# EAGLE board TuesdayR3_JIG (EAGLE 7.7.0)
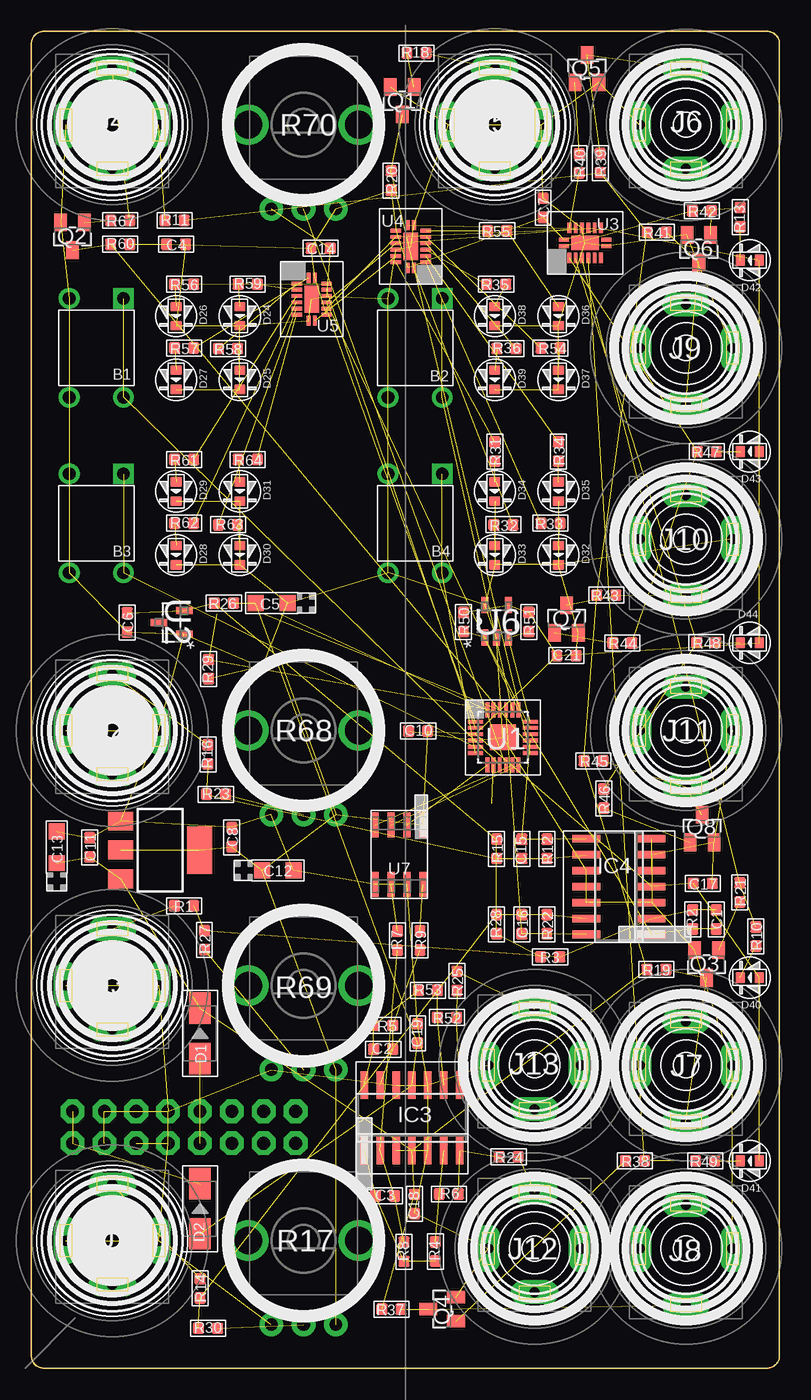
[diagram p0: board, top side]
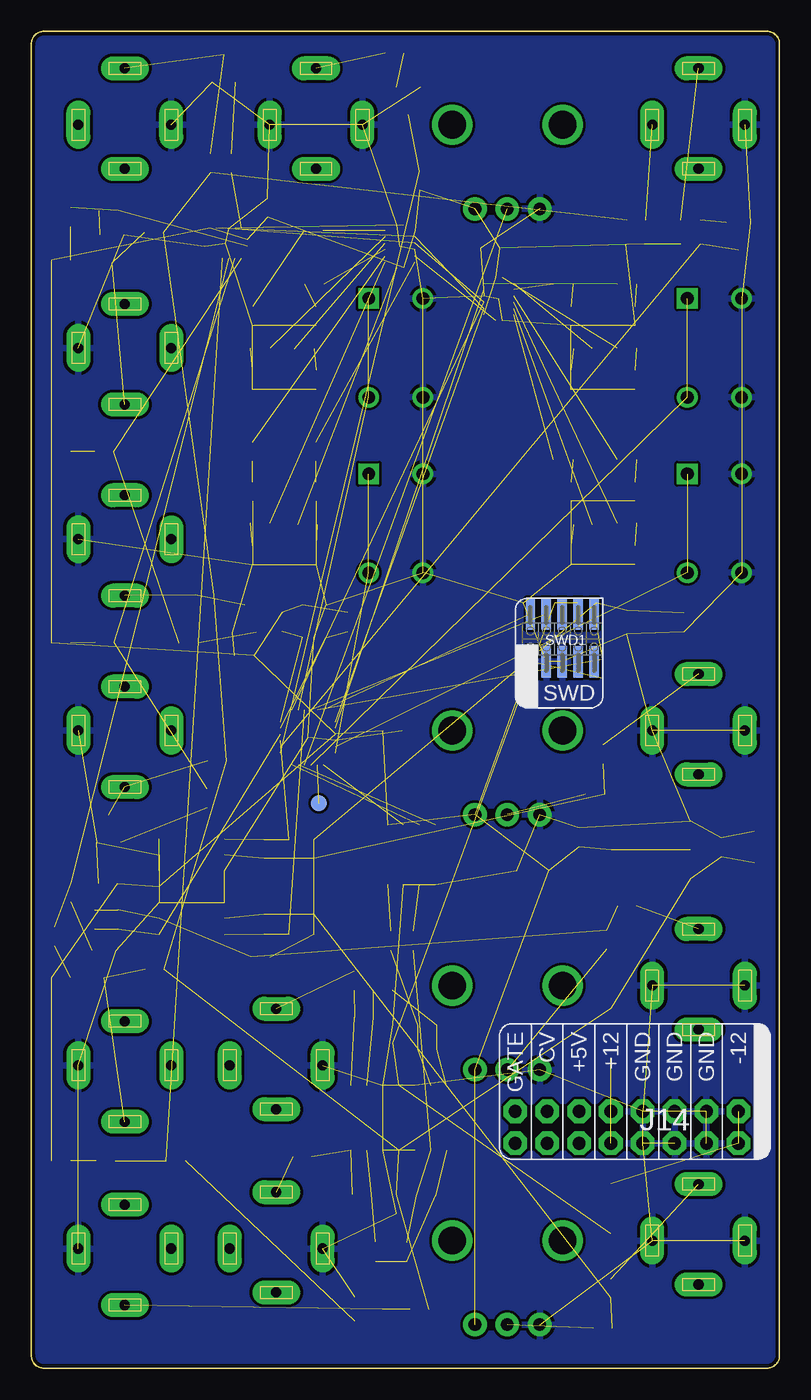
[diagram p1: board, bottom side, seen from below]

Size 59.62 x 106.5 mm. Coordinates in mm from the lower left corner, seen from the top.
Copper layers (1*16): Top 0.035mm / dielectric 1.5mm / Bottom 0.035mm
Design rules "dirt_cheap_dirty_boards.v1": minimum track width 5mil, minimum drill 12mil, track to track 5mil, track to pad 5mil, pad to pad 5mil, via to via 5mil, smd to smd 0mil, copper to edge 10mil, drill to drill 10mil, minimum pad ring 10mil, minimum via ring 6mil, stop-mask expansion 2mil, vias tented up to drill 25mil, thermal gap 10mil
Net classes: 0 default: width 0.203 mm, clearance 0.178 mm; 1 heavypower: width 0.381 mm; 2 mediumpower: width 0.254 mm; 3 groundplane: width 0.254 mm, clearance 0.203 mm

## Footprints (pad centres in the part's own frame; a part is rotated, then mirrored left to right if it is on the bottom)
4P-6.0X6.0X5.0H = drill 1.016 pad 1.651 square: 1 -3.937,2.159 | drill 1.016 pad 1.651: 2 -3.937,-2.159; 3 3.937,-2.159; 4 3.937,2.159
C0603 = smd 0.889 x 0.889: 1 -0.762,0; 2 0.762,0
AVX-A = smd 1.27 x 1.27: + -1.27,0; - 1.27,0
DO-214AC = smd 2.5 x 1.7: 1 -2,0; 2 2,0
LED0603 = smd 0.762 x 0.889: + -0.762,0; - 0.762,0
SOT223 = smd 1.5 x 2: 1 -2.3,-3.15; 2 0,-3.15; 3 2.3,-3.15 | smd 3.8 x 2: 4 0,3.15
SO14 = smd 0.6 x 2.2: 1 -3.81,-2.6; 2 -2.54,-2.6; 3 -1.27,-2.6; 4 0,-2.6; 5 1.27,-2.6; 6 2.54,-2.6; 7 3.81,-2.6; 8 3.81,2.6; 9 2.54,2.6; 10 1.27,2.6; 11 0,2.6; 12 -1.27,2.6; 13 -2.54,2.6; 14 -3.81,2.6
3.5MM-JACK-SWITCH-13MM-INPUT = drill 0.8 pad 1.93 long: RING@3 -3.7,0; SECOND@3 0,-3.5; SWITCH@3 3.7,0; TIP@3 0,4.5
3.5MM-JACK-SWITCH-13MM-OUTPUT = drill 0.8 pad 1.93 long: RING@3 -3.7,0; SECOND@3 0,-3.5; SWITCH@3 3.7,0; TIP@3 0,4.5
POWER_16 = drill 1.016 pad 1.88 octagon: 1 -6.35,-1.27; 2 -6.35,1.27; 3 -3.81,-1.27; 4 -3.81,1.27; 5 -1.27,-1.27; 6 -1.27,1.27; 7 1.27,-1.27; 8 1.27,1.27; 9 3.81,-1.27; 10 3.81,1.27; 11 6.35,-1.27; 12 6.35,1.27; 13 8.89,-1.27; 14 8.89,1.27; 15 11.43,-1.27; 16 11.43,1.27
SOT23-BEC = smd 1 x 1.4: B -0.95,-1.1; C 0,1.1; E 0.95,-1.1
R0603 = smd 0.889 x 0.889: 1 -0.762,0; 2 0.762,0
OG-POTS_ALPS_POT_VERTICAL = drill 1 pad 1.88: P$1 -2.58,-6.7; P$2 0,-6.7; P$3 2.58,-6.7 | drill 2.2 pad 3.175: P$4 4.4,0; P$5 -4.4,0
M50-3600542 = smd 0.75 x 2.5: 1 -2.54,-1.81; 2 -2.54,2; 3 -1.27,-1.81; 4 -1.27,2; 5 0,-1.81; 6 0,2; 7 1.27,-1.81; 8 1.27,2; 9 2.54,-1.81; 10 2.54,2
B1,27 = smd 1.27 x 1.27: TP 0,0
QFN50P400X400X100-25N = smd 1.2 x 0.3: 1 -2.2,1.245; 2 -2.2,0.762; 3 -2.2,0.254; 4 -2.2,-0.254; 5 -2.2,-0.762; 6 -2.2,-1.245; 13 2.2,-1.245; 14 2.2,-0.762; 15 2.2,-0.254; 16 2.2,0.254; 17 2.2,0.762; 18 2.2,1.245 | smd 0.3 x 1.2: 7 -1.245,-2.2; 8 -0.762,-2.2; 9 -0.254,-2.2; 10 0.254,-2.2; 11 0.762,-2.2; 12 1.245,-2.2; 19 1.245,2.2; 20 0.762,2.2; 21 0.254,2.2; 22 -0.254,2.2 | smd 0.305 x 1.2: 23 -0.762,2.2; 24 -1.245,2.2 | smd 2.032 x 2.032: 25 0,0
SOT95P237X112-3N = smd 1.321 x 0.559: 1 -1.016,0.94; 2 -1.016,-0.94; 3 1.016,0
QFN50P250X350X100-17N = smd 0.305 x 0.813: 1 -0.254,1.702; 8 -0.254,-1.702; 9 0.254,-1.702; 16 0.254,1.702 | smd 0.813 x 0.305: 2 -1.194,1.245; 3 -1.194,0.762; 4 -1.194,0.254; 5 -1.194,-0.254; 6 -1.194,-0.762; 7 -1.194,-1.245; 10 1.194,-1.245; 11 1.194,-0.762; 12 1.194,-0.254; 13 1.194,0.254; 14 1.194,0.762; 15 1.194,1.245 | smd 1.143 x 2.159: 17 0,0
SOT95P290X145-5N = smd 1.27 x 0.559: 1 -1.295,0.94; 2 -1.295,0; 3 -1.295,-0.94; 4 1.295,-0.94; 5 1.295,0.94
SOIC8-N_MC = smd 1.981 x 0.559: 1 -2.362,1.905; 2 -2.362,0.635; 3 -2.362,-0.635; 4 -2.362,-1.905; 5 2.362,-1.905; 6 2.362,-0.635; 7 2.362,0.635; 8 2.362,1.905

## Placement (x,y rotation side)
B1  BUTTON-4P-3110040P1  [4P-6.0X6.0X5.0H]  5.18,81.28 270 top
B2  BUTTON-4P-3110040P1  [4P-6.0X6.0X5.0H]  30.58,81.28 270 top
B3  BUTTON-4P-3110040P1  [4P-6.0X6.0X5.0H]  5.18,67.31 270 top
B4  BUTTON-4P-3110040P1  [4P-6.0X6.0X5.0H]  30.58,67.31 270 top
C1  3.3nF  [C0603]  54.58,35.75 270 top
C2  3.3nF  [C0603]  28.04,25.4 180 top
C3  3.3nF  [C0603]  28.17,13.72 180 top
C4  100nF  [C0603]  11.53,89.53 180 top
C5  10uF  [AVX-A]  19.15,60.96 180 top
C6  100nF  [C0603]  7.63,59.41 90 top
C7  100nF  [C0603]  40.78,92.45 270 top
C8  100nF  [C0603]  15.97,42.3 270 top
C10  100nF  [C0603]  30.83,50.75 0 top
C11  100nF  [C0603]  4.65,41.49 270 top
C12  10uF  [AVX-A]  19.64,39.66 0 top
C13  10uF  [AVX-A]  2.02,41.5 90 top
C14  100nF  [C0603]  23.05,89.23 180 top
C15  3.3nF  [C0603]  39.08,41.37 90 top
C16  3.3nF  [C0603]  39.08,35.37 270 top
C17  100nF  [C0603]  53.51,38.62 0 top
C18  100nF  [C0603]  30.54,13.08 90 top
C19  100nF  [C0603]  30.79,26.66 270 top
C21  100nF  [C0603]  42.64,56.77 180 top
D1  MRA4004T3G  [DO-214AC]  13.44,26.67 90 top
D2  MRA4004T3G  [DO-214AC]  13.44,12.7 90 top
D24  yellow  [LED0603]  16.61,83.82 270 top
D25  yellow  [LED0603]  16.61,78.74 270 top
D26  yellow  [LED0603]  11.53,83.82 270 top
D27  yellow  [LED0603]  11.53,78.74 270 top
D28  yellow  [LED0603]  11.53,64.77 270 top
D29  yellow  [LED0603]  11.53,69.85 270 top
D30  yellow  [LED0603]  16.61,64.77 270 top
D31  yellow  [LED0603]  16.61,69.85 270 top
D32  yellow  [LED0603]  42.01,64.77 270 top
D33  yellow  [LED0603]  36.93,64.77 270 top
D34  yellow  [LED0603]  36.93,69.85 270 top
D35  yellow  [LED0603]  42.01,69.85 270 top
D36  yellow  [LED0603]  42.01,83.82 270 top
D37  yellow  [LED0603]  42.01,78.74 270 top
D38  yellow  [LED0603]  36.93,83.82 270 top
D39  yellow  [LED0603]  36.93,78.74 270 top
D40  yellow  [LED0603]  57.25,31.11 180 top
D41  yellow  [LED0603]  57.25,16.51 180 top
D42  yellow  [LED0603]  57.25,88.27 180 top
D43  yellow  [LED0603]  57.25,73.03 180 top
D44  yellow  [LED0603]  57.25,57.78 180 top
IC1  LD1117S33CTR  [SOT223]  10.26,41.27 270 top
IC3  TL074D  [SO14]  30.33,19.93 0 top
IC4  MCP6004  [SO14]  46.83,38.37 90 top
J1  PJ-341  [3.5MM-JACK-SWITCH-13MM-INPUT]  6.45,10.16 0 top
J2  PJ-341  [3.5MM-JACK-SWITCH-13MM-INPUT]  6.45,50.8 0 top
J3  PJ-341  [3.5MM-JACK-SWITCH-13MM-INPUT]  6.45,30.48 0 top
J4  PJ-341  [3.5MM-JACK-SWITCH-13MM-INPUT]  6.45,99.06 0 top
J5  PJ-341  [3.5MM-JACK-SWITCH-13MM-INPUT]  36.93,99.06 0 top
J6  PJ-341  [3.5MM-JACK-SWITCH-13MM-OUTPUT]  52.17,99.06 0 top
J7  PJ-341  [3.5MM-JACK-SWITCH-13MM-OUTPUT]  52.17,24.13 180 top
J8  PJ-341  [3.5MM-JACK-SWITCH-13MM-OUTPUT]  52.17,9.53 180 top
J9  PJ-341  [3.5MM-JACK-SWITCH-13MM-OUTPUT]  52.17,81.28 180 top
J10  PJ-341  [3.5MM-JACK-SWITCH-13MM-OUTPUT]  52.17,66.04 180 top
J11  PJ-341  [3.5MM-JACK-SWITCH-13MM-OUTPUT]  52.17,50.8 180 top
J12  PJ-341  [3.5MM-JACK-SWITCH-13MM-OUTPUT]  40.1,9.53 0 top
J13  PJ-341  [3.5MM-JACK-SWITCH-13MM-OUTPUT]  40.1,24.13 0 top
J14  POWER  [POWER_16]  9.62,19.18 180 bottom
OUTLINE  EURORACK_PCB12HP  [EURORACK12HPPCB]  -0.5,0 0 top
Q1  MMBT3904  [SOT23-BEC]  29.56,100.97 180 top
Q2  MMBT3904  [SOT23-BEC]  3.28,90.17 180 top
Q3  MMBT3904  [SOT23-BEC]  53.82,32.19 180 top
Q4  MMBT3904  [SOT23-BEC]  32.74,4.7 90 top
Q5  MMBT3904  [SOT23-BEC]  44.27,103.53 0 top
Q6  MMBT3904  [SOT23-BEC]  53.19,89.19 180 top
Q7  MMBT3904  [SOT23-BEC]  42.64,59.69 0 top
Q8  MMBT3904  [SOT23-BEC]  53.45,42.98 0 top
R1  100k  [R0603]  12.17,36.83 180 top
R2  33k  [R0603]  52.7,35.75 90 top
R3  51k  [R0603]  41.34,32.77 180 top
R4  100k  [R0603]  32.19,9.29 90 top
R5  30k  [R0603]  28.04,27.3 0 top
R6  100k  [R0603]  33.27,13.87 0 top
R7  12k  [R0603]  29.17,34.06 90 top
R8  30k  [R0603]  29.7,9.28 90 top
R9  12k  [R0603]  30.96,34.06 90 top
R10  56  [R0603]  57.74,34.38 90 top
R11  10k  [R0603]  11.42,91.44 0 top
R12  33k  [R0603]  41.08,41.37 270 top
R13  56  [R0603]  56.49,91.69 90 top
R14  100k  [R0603]  13.44,6.35 90 top
R15  51k  [R0603]  37.08,41.37 90 top
R16  100k  [R0603]  14.07,48.9 90 top
R17  10kB  [OG-POTS_ALPS_POT_VERTICAL]  21.69,10.16 0 top
R18  100k  [R0603]  30.7,104.78 180 top
R19  10k  [R0603]  49.81,31.76 180 top
R20  10k  [R0603]  28.67,94.61 270 top
R21  100k  [R0603]  56.45,37.89 270 top
R22  33k  [R0603]  41.08,35.37 90 top
R23  33k  [R0603]  14.71,45.72 0 top
R24  100  [R0603]  38.03,16.83 180 top
R25  100  [R0603]  33.91,30.85 270 top
R26  10k  [R0603]  15.34,60.96 180 top
R27  33k  [R0603]  13.79,34.1 270 top
R28  51k  [R0603]  37.08,35.37 270 top
R29  10k  [R0603]  14.12,55.69 90 top
R30  33k  [R0603]  14.07,3.17 0 top
R31  56  [R0603]  36.93,73.03 90 top
R32  56  [R0603]  37.61,67.19 0 top
R33  56  [R0603]  41.38,67.31 180 top
R34  56  [R0603]  42.01,73.03 90 top
R35  56  [R0603]  37.05,86.36 180 top
R36  56  [R0603]  37.86,81.22 0 top
R37  10k  [R0603]  28.7,4.7 180 top
R38  100k  [R0603]  48.11,16.51 180 top
R39  10k  [R0603]  45.33,96 270 top
R40  100k  [R0603]  43.66,95.99 90 top
R41  10k  [R0603]  49.83,90.5 180 top
R42  100k  [R0603]  53.44,92.2 0 top
R43  10k  [R0603]  45.82,61.59 180 top
R44  100k  [R0603]  47.09,57.78 180 top
R45  10k  [R0603]  44.8,48.39 180 top
R46  100k  [R0603]  45.62,45.37 270 top
R47  56  [R0603]  53.82,73.03 180 top
R48  56  [R0603]  53.79,57.81 180 top
R49  56  [R0603]  53.69,16.51 180 top
R50  2k  [R0603]  34.43,59.45 270 top
R51  2k  [R0603]  39.64,59.45 270 top
R52  100k  [R0603]  33.12,27.94 0 top
R53  100k  [R0603]  31.6,30.1 0 top
R54  56  [R0603]  41.38,81.28 180 top
R55  56  [R0603]  37.12,90.61 180 top
R56  56  [R0603]  12.17,86.36 0 top
R57  56  [R0603]  12.17,81.28 0 top
R58  56  [R0603]  15.67,81.22 180 top
R59  56  [R0603]  17.24,86.36 0 top
R60  10k  [R0603]  7.09,89.53 0 top
R61  56  [R0603]  12.17,72.39 0 top
R62  56  [R0603]  12.17,67.31 0 top
R63  56  [R0603]  15.67,67.19 180 top
R64  56  [R0603]  17.24,72.39 0 top
R67  100k  [R0603]  7.09,91.44 180 top
R68  10kB  [OG-POTS_ALPS_POT_VERTICAL]  21.69,50.8 0 top
R69  10kB  [OG-POTS_ALPS_POT_VERTICAL]  21.69,30.48 0 top
R70  10kB  [OG-POTS_ALPS_POT_VERTICAL]  21.69,99.06 0 top
SWD1  CORTEX_SWD  [M50-3600542]  17.31,58.09 0 bottom
TP1  TPB1,27  [B1,27]  36.7,45 0 bottom
U1  MKL02Z32VFK4  [QFN50P400X400X100-25N]  37.58,50.25 0 top
U2  LM4040DIM3-5.0  [SOT95P237X112-3N]  11.17,59.41 180 top
U3  74HC595BQ  [QFN50P250X350X100-17N]  44.13,89.64 90 top
U4  74HC595BQ  [QFN50P250X350X100-17N]  30.23,89.36 180 top
U5  74HC595BQ  [QFN50P250X350X100-17N]  22.34,85.17 0 top
U6  24LC16T-I/OT  [SOT95P290X145-5N]  37.08,59.5 90 top
U7  MCP4822-E/SN  [SOIC8-N_MC]  29.31,40.91 270 top

## Library data of the parts
B1 = zephod-components; DESC: Algorithm; OC_FARNELL: unknown
B2 = zephod-components; DESC: Ticks; OC_FARNELL: unknown
B3 = zephod-components; DESC: Scale; OC_FARNELL: unknown
B4 = zephod-components; DESC: Beats; OC_FARNELL: unknown
C1-C3 C15 C16 R1-R16 R18-R64 R67 = OPL; OC_FARNELL: unknown
C4 C7 C8 C10 C11 C14 C17-C19 C21 = OPL; MF: MULTICOMP; MPN: MC0603F104Z160CT; OC_FARNELL: 1759017
C5 C12 C13 = OPL; MF: AVX; MPN: TAJB106K020RNJ; OC_FARNELL: 197427
C6 = OPL; MF: AVX; MPN: 06035C104KAT2A; OC_FARNELL: 1301804
D1 D2 = OPL; MF: VISHAY; MPN: US1G-E3/5AT; OC_FARNELL: 9551824
D24-D44 = OPL
IC1 = ld-components; MF: STMICROELECTRONICS; MPN: LD1117AS33TR; OC_FARNELL: 1467776
IC3 = EurorackModularParts; MF: TEXAS INSTRUMENTS; MPN: TL074CD; OC_FARNELL: 1103010
IC4 = EurorackModularParts; MF: MICROCHIP; MPN: MCP6004-I/SL.; OC_FARNELL: 1605572
J1 R17 = EurorackModularParts; DESC: Intensity; OC_FARNELL: unknown
J2 R68 = EurorackModularParts; DESC: Seed X; OC_FARNELL: unknown
J3 R69 = EurorackModularParts; DESC: Seed Y; OC_FARNELL: unknown
J4 = EurorackModularParts; DESC: Clock; OC_FARNELL: unknown
J5 = EurorackModularParts; DESC: Reset; OC_FARNELL: unknown
J6 = EurorackModularParts; DESC: Clock Out; OC_FARNELL: unknown
J7 = EurorackModularParts; DESC: Accent; OC_FARNELL: unknown
J8 = EurorackModularParts; DESC: Gate; OC_FARNELL: unknown
J9 = EurorackModularParts; DESC: Tick; OC_FARNELL: unknown
J10 = EurorackModularParts; DESC: Beat; OC_FARNELL: unknown
J11 = EurorackModularParts; DESC: Loop; OC_FARNELL: unknown
J12 = EurorackModularParts; DESC: Note; OC_FARNELL: unknown
J13 = EurorackModularParts; DESC: Velocity; OC_FARNELL: unknown
J14 = eurorack; OC_FARNELL: unknown
OUTLINE = EurorackModularParts; OC_FARNELL: unknown
Q1-Q8 = transistor; MF: NXP; MPN: PMBT3904,215; OC_FARNELL: 2336795
R70 = EurorackModularParts; DESC: Tempo; OC_FARNELL: unknown
SWD1 = carrilib with jtags; OC_FARNELL: unknown
TP1 = testpad; OC_FARNELL: unknown
U1 = FarnellThings; MF: NXP; MPN: MKL02Z32VFK4; OC_FARNELL: 2321481; OC_NEWARK: 61W9887; PACKAGE: QFN-24; SUPPLIER: FREESCALE SEMICONDUCTOR
U2 = FarnellThings; MF: TEXAS INSTRUMENTS; MPN: LM4040DIM3-5.0; OC_FARNELL: 9778330; OC_NEWARK: 97K3489; PACKAGE: SOT-23-3; SUPPLIER: TEXAS INSTRUMENTS
U3-U5 = FarnellThings; MF: NXP; MPN: 74HC595BQ; OC_FARNELL: 2164850; OC_NEWARK: 43W8000; PACKAGE: QFN-16; SUPPLIER: NXP
U6 = EurorackModularParts; MF: MICROCHIP; MPN: 24LC00T-I/OT; OC_FARNELL: 9757864; OC_NEWARK: 62K0574; PACKAGE: SOT-23-5; SUPPLIER: MICROCHIP
U7 = FarnellThings; DESCRIPTION: 12 Bit DAC; MF: MICROCHIP; MPN: MCP4822-E/SN; OC_FARNELL: 1439414; OC_NEWARK: 31K2975; PACKAGE: SOIC-8; SUPPLIER: Microchip

## Nets
3.3V [mediumpower]: C4.2 C7.2 C8.2 C10.2 C12.+ C14.2 C17.1 C21.2 D40.+ D41.+ D42.+ D43.+ D44.+ IC1.2 IC1.4 IC4.4 R17.P$3 R20.2 R29.1 R50.1 R51.1 R60.2 R68.P$3 R69.P$3 R70.P$3 SWD1.1 U1.3 U3.10 U3.16 U4.10 U4.16 U5.10 U5.16 U6.4 U7.1
12V [heavypower]: C11.2 C13.+ C18.2 D1.2 IC1.3 IC3.4 R11.2 R19.2 R37.2 R39.2 R41.2 R43.2 R45.2
-12V [heavypower]: C5.- C19.2 D2.1 IC3.11 R26.1
ADC_IN1: C15.2 IC4.8 R12.1 U1.15
ADC_IN2: C1.2 IC4.1 R2.1 U1.16
ADC_INTENSITY: C16.2 IC4.14 R22.1 U1.21
BUTTON_ALGO: B1.1 B1.4 U1.9
BUTTON_BEATS: B4.1 B4.4 U1.6
BUTTON_SCALE: B3.1 B3.4 U1.5
BUTTON_TPB: B2.1 B2.4 U1.20
CLOCK: U1.1 U3.11 U4.11 U5.11
CLOCK_IN: Q2.C R60.1 U1.14
CPU_RESET: R29.2 SWD1.10 U1.23
D21: D43.- R47.1
DACCS: U1.7 U7.2
DACSCK: U1.12 U7.3
DACSDI: U1.11 U7.4
GND [groundplane]: B1.2 B1.3 B2.2 B2.3 B3.2 B3.3 B4.2 B4.3 C4.1 C5.+ C6.1 C7.1 C8.1 C10.1 C11.1 C12.- C13.- C14.1 C17.2 C18.1 C19.1 C21.1 D24.- D25.- D26.- D27.- D28.- D29.- D30.- D31.- D32.- D33.- D34.- D35.- D36.- D37.- D38.- D39.- IC1.1 IC3.3 IC3.5 IC3.10 IC3.12 IC4.3 IC4.6 IC4.10 IC4.11 IC4.12 J1.RING@3 J1.SWITCH@3 J2.RING@3 J2.SWITCH@3 J3.RING@3 J3.SWITCH@3 J4.RING@3 J5.RING@3 J5.SWITCH@3 J6.RING@3 J7.RING@3 J8.RING@3 J9.RING@3 J10.RING@3 J11.RING@3 J12.RING@3 J13.RING@3 J14.3 J14.4 J14.5 J14.6 J14.7 J14.8 Q1.E Q2.E Q3.E Q4.E Q5.E Q6.E Q7.E Q8.E R17.P$1 R68.P$1 R69.P$1 R70.P$1 SWD1.3 SWD1.5 U1.4 U1.25 U2.1 U3.8 U3.13 U3.17 U4.8 U4.13 U4.17 U5.8 U5.13 U5.17 U6.2 U6.5 U7.5 U7.7
KNOB_IN1: R23.2 R68.P$2
KNOB_IN2: R27.2 R69.P$2
KNOB_INTENSITY: R17.P$2 R30.2
KNOB_TEMPO: R70.P$2 U1.10
LATCH: U1.19 U3.12 U4.12 U5.12
N$1: R32.2 U4.1
N$2: IC3.6 R4.2 R6.1
N$3: J2.TIP@3 R16.2
N$4: C15.1 IC4.9 R12.2 R15.1 R16.1 R23.1
N$5: R9.2 U7.8
N$6: J3.TIP@3 R1.2
N$7: R7.2 U7.6
N$8: C1.1 IC4.2 R1.1 R2.2 R3.1 R27.1
N$9: C2.1 IC3.13 R5.2 R9.1
N$10: C3.1 IC3.2 R7.1 R8.2
N$12: D42.- R13.1
N$13 [heavypower]: D1.1 J14.9 J14.10
N$14: IC3.7 R6.2 R24.2
N$15: Q1.B R18.2
N$16: J5.TIP@3 R18.1
N$17: IC3.9 R52.1 R53.2
N$18: C3.2 IC3.1 R4.1 R8.1
N$19: R33.2 U4.2
N$20: J13.TIP@3 R25.1
N$21: J12.TIP@3 R24.1
N$23: D40.- R10.1
N$24: C2.2 IC3.14 R5.1 R53.1
N$25: Q3.B R21.2
N$26: R34.2 U4.3
N$27: R35.2 U4.4
N$28: D28.+ R62.1
N$29: J7.TIP@3 Q3.C R19.1
N$30: R36.2 U4.5
N$31: R54.2 U4.6
N$32: D29.+ R61.1
N$33: J1.TIP@3 R14.2
N$34: C16.1 IC4.13 R14.1 R22.2 R28.1 R30.1
N$35: R55.2 U4.7
N$36: R31.2 U4.15
N$37: R56.2 U5.15
N$38: R57.2 U5.1
N$39: R58.2 U5.2
N$40: R59.2 U5.3
N$41: R61.2 U5.4
N$42: R62.2 U5.5
N$43: J4.TIP@3 R67.1
N$44: D41.- R49.1
N$45: D44.- R48.1
N$48: R63.2 U5.6
N$49: R64.2 U5.7
N$57: Q4.B R38.2
N$58: J8.TIP@3 Q4.C R37.1
N$60: Q5.B R40.2
N$61: J6.TIP@3 Q5.C R39.1
N$63: Q6.B R42.2
N$64 [heavypower]: D2.2 J14.1 J14.2
N$65: J9.TIP@3 Q6.C R41.1
N$66: Q2.B R67.2
N$68: Q7.B R44.2
N$69: J10.TIP@3 Q7.C R43.1
N$71: Q8.B R46.2
N$72: J11.TIP@3 Q8.C R45.1
N$73: D27.+ R57.1
N$74: D26.+ R56.1
N$75: D25.+ R58.1
N$76: D24.+ R59.1
N$77: D30.+ R63.1
N$78: D31.+ R64.1
N$79: D32.+ R33.1
N$80: D33.+ R32.1
N$81: D34.+ R31.1
N$82: D35.+ R34.1
N$83: D36.+ R55.1
N$84: D37.+ R54.1
N$85: D38.+ R35.1
N$86: D39.+ R36.1
N$94: IC3.8 R25.2 R52.2
N$96: J4.SWITCH@3 R11.1
N$97: IC4.5 IC4.7
OUT_ACCENT: R10.2 R21.1 U3.4
OUT_BEAT: R44.1 R47.2 U3.2
OUT_CLOCK: R40.1 U3.15
OUT_GATE: R38.1 R49.2 U3.5
OUT_LOOP: R46.1 R48.2 U3.3
OUT_TICK: R13.2 R42.1 U3.1
PTA6: TP1.TP U1.8
REF_-5V: C6.2 R3.2 R15.2 R26.2 R28.2 U2.2
RESET_PATTERN: Q1.C R20.1 U1.13
SCL: R50.2 U1.17 U6.1
SDA: R51.2 U1.18 U6.3
SHIFTER1TO2: U4.14 U5.9
SHIFTER2TO3: U3.14 U4.9
SHIFTERS: U1.2 U5.14
SWD_CLK: SWD1.4 U1.22
SWD_DIO: SWD1.2 U1.24

## Tracks (layer width: path | path; a pad name or v marks a point on that pad's centre or on a via)
3.3V  (34 unrouted)
12V  (12 unrouted)
-12V  (4 unrouted)
ADC_IN1  (3 unrouted)
ADC_IN2  (3 unrouted)
ADC_INTENSITY  (3 unrouted)
BUTTON_ALGO  (2 unrouted)
BUTTON_BEATS  (2 unrouted)
BUTTON_SCALE  (2 unrouted)
BUTTON_TPB  (2 unrouted)
CLOCK  (3 unrouted)
CLOCK_IN  (2 unrouted)
CPU_RESET  (2 unrouted)
D21  (1 unrouted)
DACCS  (1 unrouted)
DACSCK  (1 unrouted)
DACSDI  (1 unrouted)
GND  (100 unrouted)
  pour Bottom: -1.3,118.87 -1.42,-13.21 62.08,-13.21 62.2,118.87
KNOB_IN1  (1 unrouted)
KNOB_IN2  (1 unrouted)
KNOB_INTENSITY  (1 unrouted)
KNOB_TEMPO  (1 unrouted)
LATCH  (3 unrouted)
N$1  (1 unrouted)
N$2  (2 unrouted)
N$3  (1 unrouted)
N$4  (5 unrouted)
N$5  (1 unrouted)
N$6  (1 unrouted)
N$7  (1 unrouted)
N$8  (5 unrouted)
N$9  (3 unrouted)
N$10  (3 unrouted)
N$12  (1 unrouted)
N$13  (2 unrouted)
N$14  (2 unrouted)
N$15  (1 unrouted)
N$16  (1 unrouted)
N$17  (2 unrouted)
N$18  (3 unrouted)
N$19  (1 unrouted)
N$20  (1 unrouted)
N$21  (1 unrouted)
N$23  (1 unrouted)
N$24  (3 unrouted)
N$25  (1 unrouted)
N$26  (1 unrouted)
N$27  (1 unrouted)
N$28  (1 unrouted)
N$29  (2 unrouted)
N$30  (1 unrouted)
N$31  (1 unrouted)
N$32  (1 unrouted)
N$33  (1 unrouted)
N$34  (5 unrouted)
N$35  (1 unrouted)
N$36  (1 unrouted)
N$37  (1 unrouted)
N$38  (1 unrouted)
N$39  (1 unrouted)
N$40  (1 unrouted)
N$41  (1 unrouted)
N$42  (1 unrouted)
N$43  (1 unrouted)
N$44  (1 unrouted)
N$45  (1 unrouted)
N$48  (1 unrouted)
N$49  (1 unrouted)
N$57  (1 unrouted)
N$58  (2 unrouted)
N$60  (1 unrouted)
N$61  (2 unrouted)
N$63  (1 unrouted)
N$64  (2 unrouted)
N$65  (2 unrouted)
N$66  (1 unrouted)
N$68  (1 unrouted)
N$69  (2 unrouted)
N$71  (1 unrouted)
N$72  (2 unrouted)
N$73  (1 unrouted)
N$74  (1 unrouted)
N$75  (1 unrouted)
N$76  (1 unrouted)
N$77  (1 unrouted)
N$78  (1 unrouted)
N$79  (1 unrouted)
N$80  (1 unrouted)
N$81  (1 unrouted)
N$82  (1 unrouted)
N$83  (1 unrouted)
N$84  (1 unrouted)
N$85  (1 unrouted)
N$86  (1 unrouted)
N$94  (2 unrouted)
N$96  (1 unrouted)
N$97  (1 unrouted)
OUT_ACCENT  (2 unrouted)
OUT_BEAT  (2 unrouted)
OUT_CLOCK  (1 unrouted)
OUT_GATE  (2 unrouted)
OUT_LOOP  (2 unrouted)
OUT_TICK  (2 unrouted)
PTA6  (1 unrouted)
REF_-5V  (5 unrouted)
RESET_PATTERN  (2 unrouted)
SCL  (2 unrouted)
SDA  (2 unrouted)
SHIFTER1TO2  (1 unrouted)
SHIFTER2TO3  (1 unrouted)
SHIFTERS  (1 unrouted)
SWD_CLK  (1 unrouted)
SWD_DIO  (1 unrouted)

## Text on the board
tNames: J4 | R70 | J5 | J6 | J9 | J10 | J2 | R68 | J11 | U1 | J3 | R69 | J13 | J7 | J1 | R17 | J12 | J8
bNames: J14